# Altium PCB aig21.PcbDoc
Units mil, origin at the board's own origin, x right, y up, seen from the top; angles counter-clockwise.
Board outline 2204.72 x 2204.72 mil, 2 copper layers (Top Layer, Bottom Layer), stack 61.855 mil thick; 150 components, 127 nets, 508 pads, 20 vias.
Unrouted connection lines stored in the file: 40.
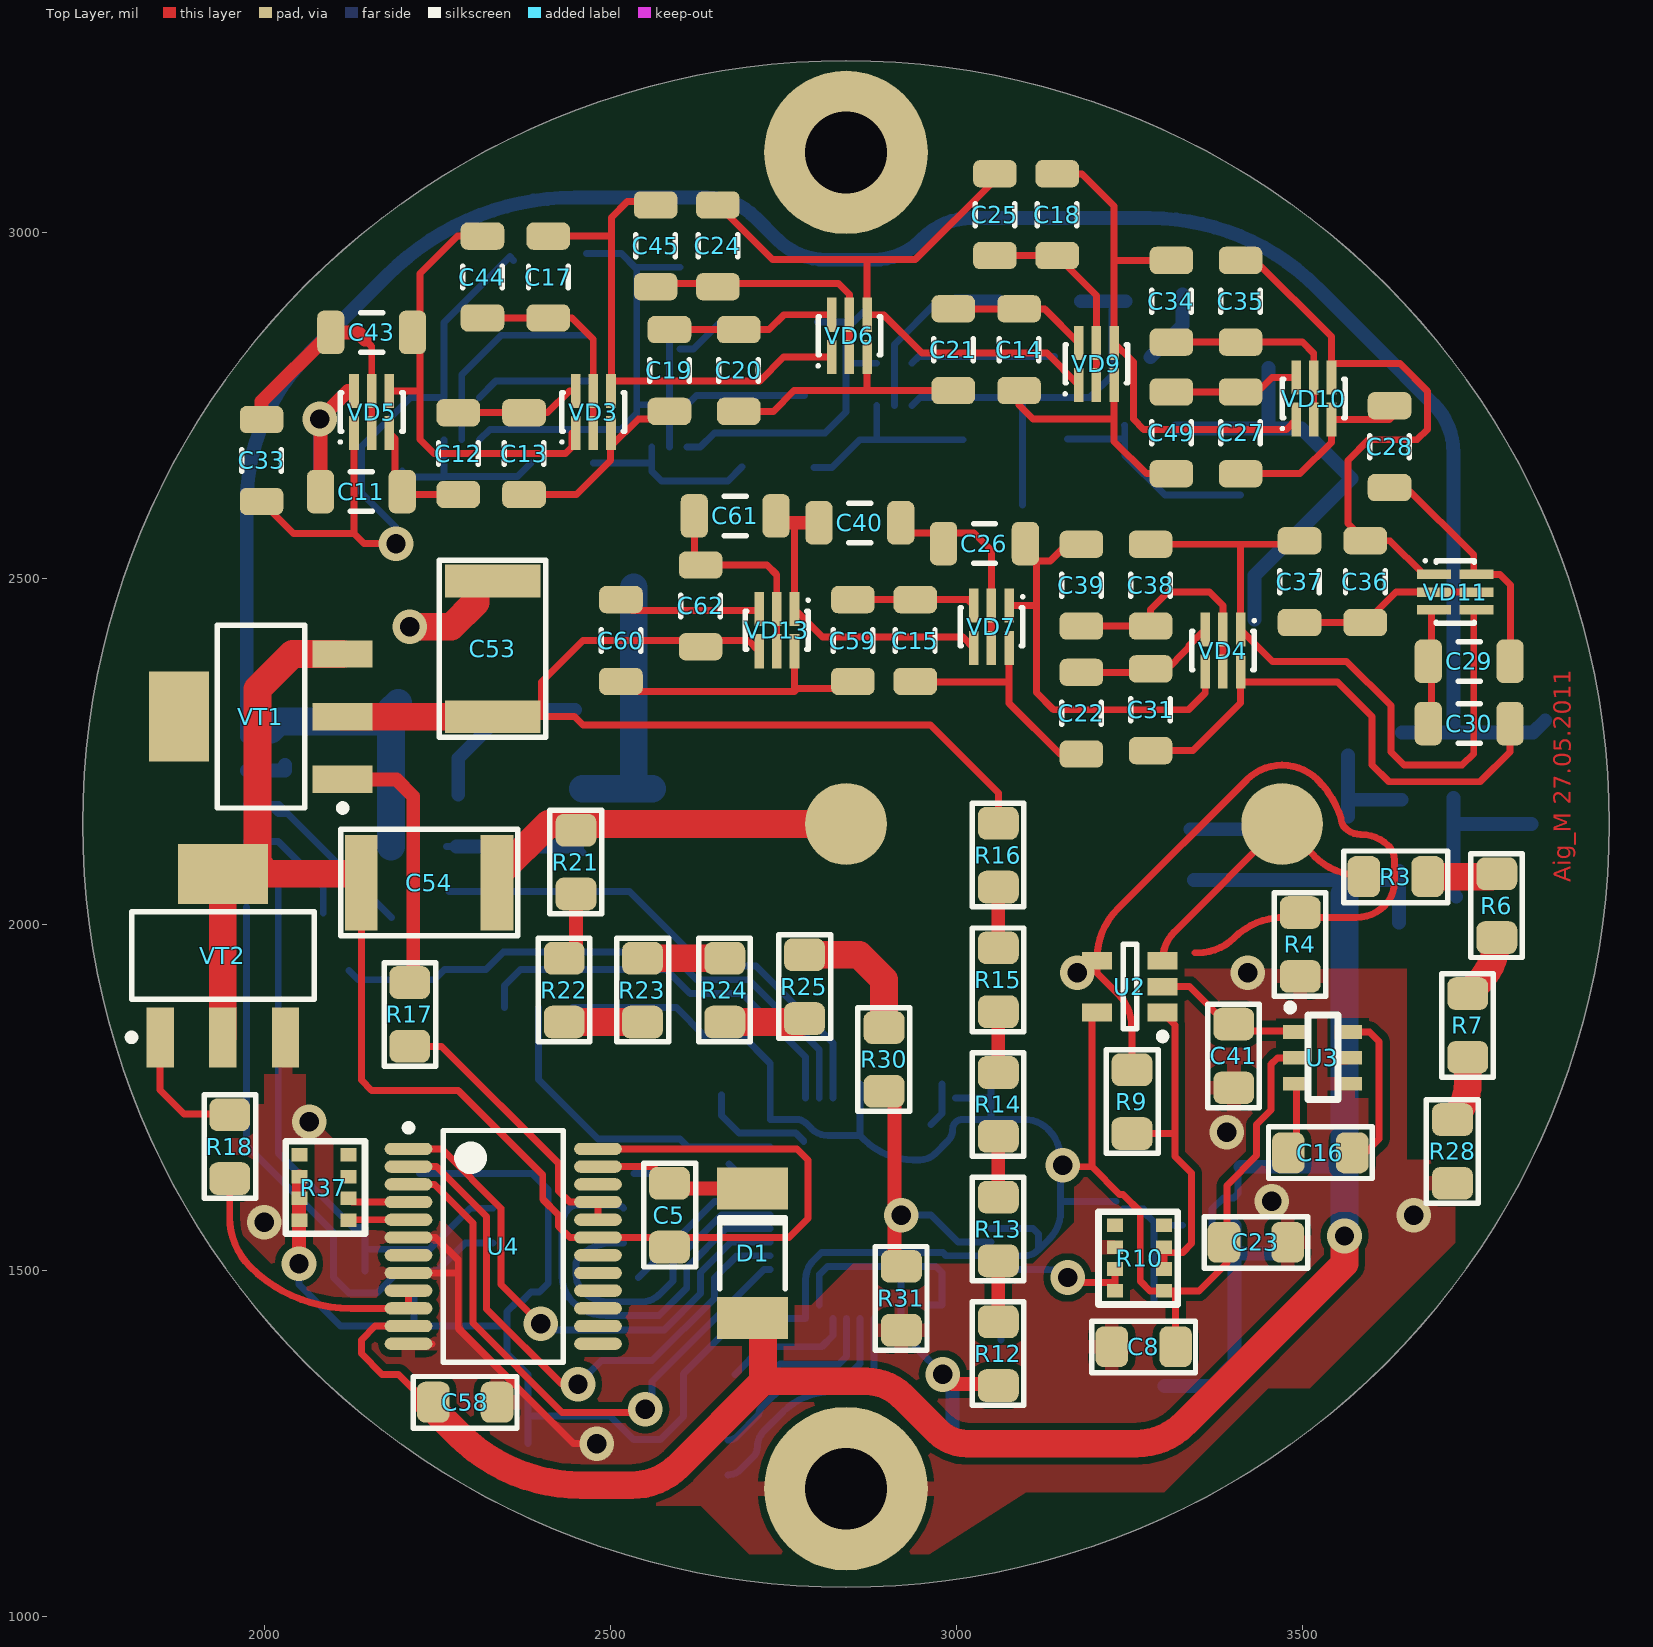
[diagram p0: Top Layer view]
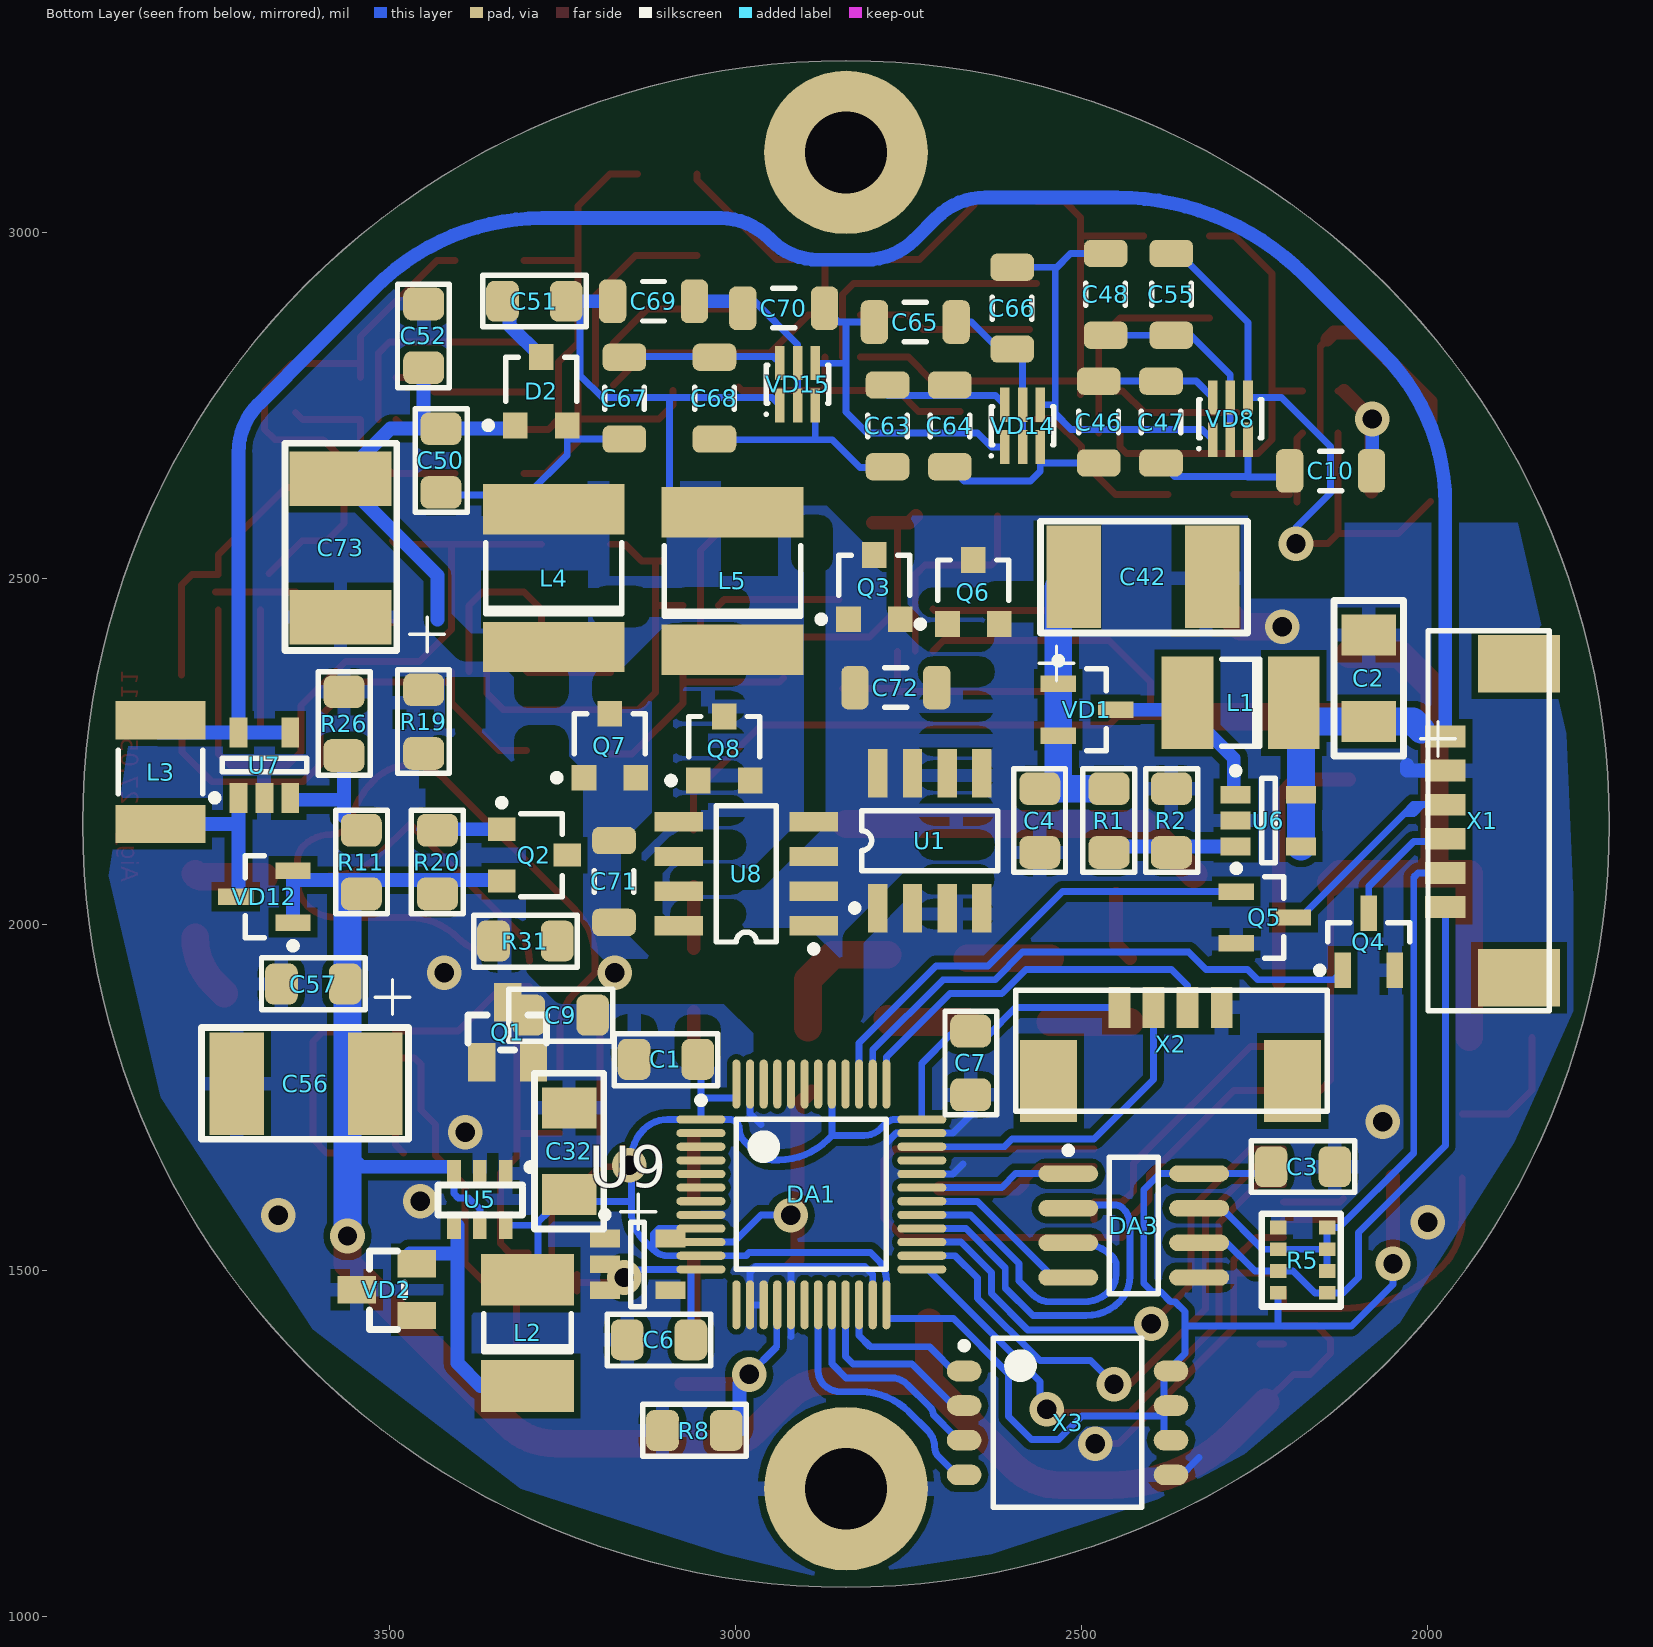
[diagram p1: Bottom Layer view, seen from below]
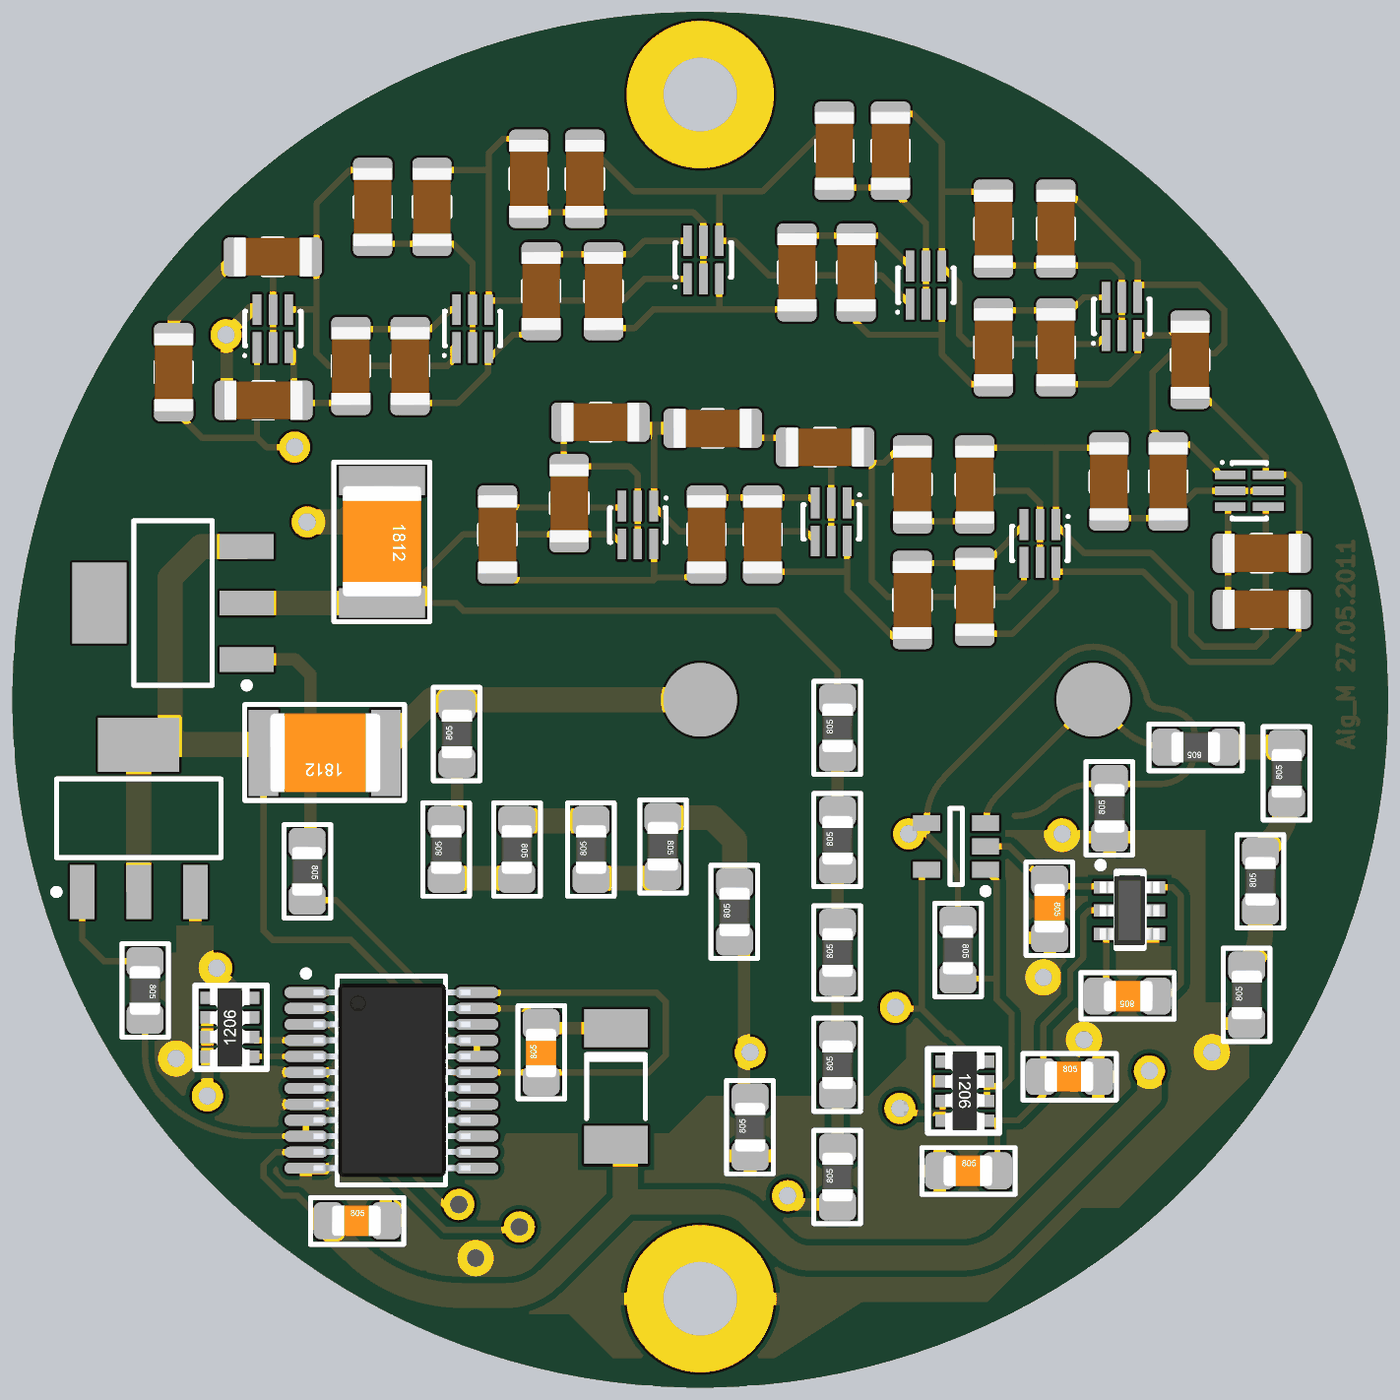
[diagram p2: 3D render of the assembled board from above, using the file's embedded part models]
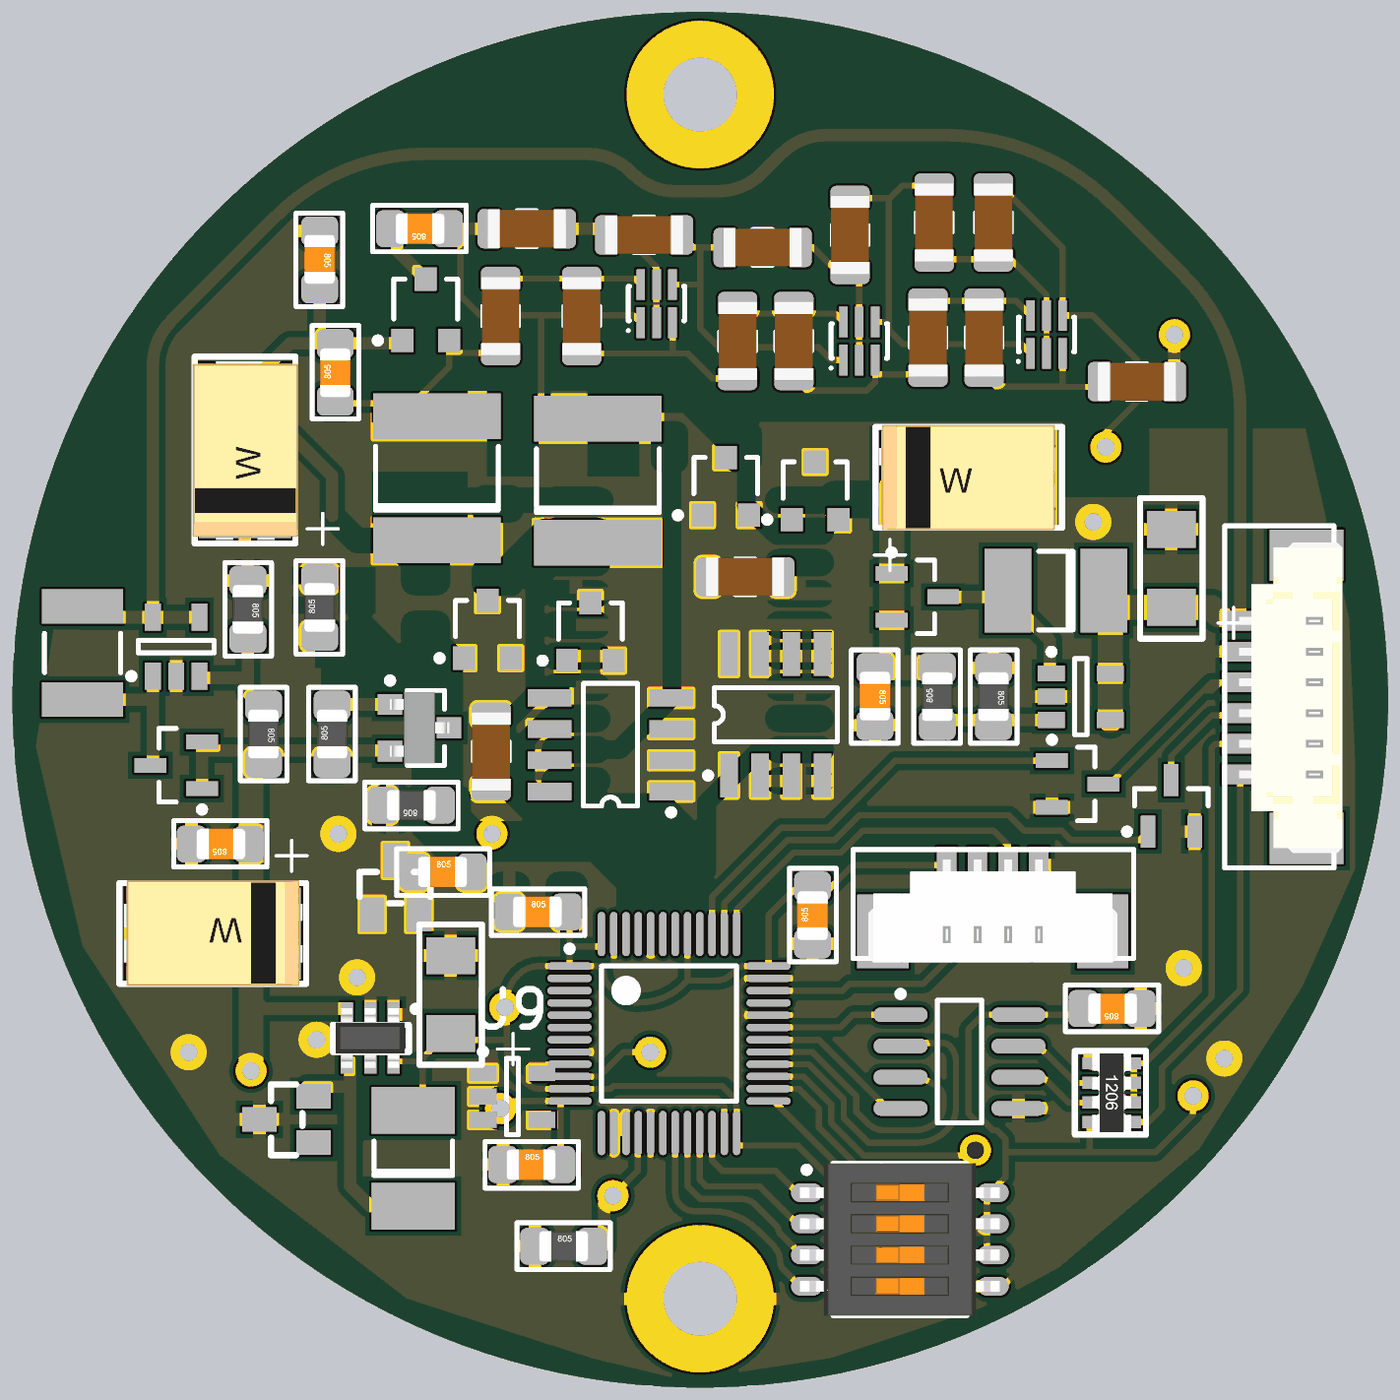
[diagram p3: 3D render of the assembled board from below, using the file's embedded part models]

## Layer stack, top to bottom
Top Layer: signal copper 1.4
Dielectric: core 59.0551, FR-4, Dk 4.8
Bottom Layer: signal copper 1.4

## Board outline
1737.64,2145 ccw(c2840,2145) 2840,1042.64 ccw(c2840,2145) 3942.36,2145 ccw(c2840,2145) 2840,3247.36 ccw(c2840,2145)

## Design rules (kind name [scope] priority, off if disabled: settings)
Clearance CPU [InComponent('DA1')] p1: gap=7.87
Clearance HV2_2 [InNetClass('HV2') vs InNetClass('HV2')] p2: gap=10
Clearance HV2 [All vs InNetClass('HV2')] p3: gap=78.74
Clearance HV1 [InNet('NetC54_1')] p4: gap=78.74
Clearance [All] p5: gap=10
DiffPairsRouting [All] p1: maxlimit=10 minlimit=10 mostfreqgap=10 maxuncoupledlength=500
HoleSize [All] p1 off: absolutevalues=TRUE maxlimit=100 minlimit=1 maxpercent=80.000 minpercent=20.000
MinimumSolderMaskSliver [All] p1 off: minsoldermaskwidth=10
PolygonConnect "for VIA" [All vs IsVia] p1: connectstyle=Direct reliefconductorwidth=10 reliefentries=4 polygonreliefangle="90 Angle"
PolygonConnect [All] p2: connectstyle=Relief reliefconductorwidth=20 reliefentries=4 polygonreliefangle="90 Angle"
RoutingVias [All] p1: holewidth=28 width=50 viastyle="Through Hole" minholewidth=28 minwidth=50 maxholewidth=28 maxwidth=50
SilkToSilkClearance [All] p1 off: silktosilkclearance=10
SilkscreenOverComponentPads [All] p1 off: minsilkscreentomaskgap=10
SolderMaskExpansion [All] p1: expansion=4
Width [All] p1: maxlimit=40 minlimit=10 preferedwidth=20
23 further rules are at their usual default settings.

## Classes and differential pairs
differential pair RS485: +RS485_P -RS485_N

## Components (designator, comment, footprint, x,y, rotation, side; value= is the part's Value field where it differs from the comment)
C1 "C0805" CC0805 3100,1805 r180 bottom
C2 "CAPASITOR A" "CAPASITOR A" 2085,2293 r90 bottom
C3 "C0805" CC0805 2180,1650 r0 bottom
C4 "C0805" CC0805 2560,2150 r270 bottom
C5 "C0805" CC0805 2585,1580 r90 top
C6 "C0805" CC0805 3110,1400 r180 bottom
C7 "C0805" CC0805 2660,1800 r90 bottom
C8 "C0805" CC0805 3270,1390 r0 top
C9 "C0805" CC0805 3252,1869 r180 bottom
C10 "C1206" С1206 2140,2655 r0 bottom
C11 "C1206" С1206 2140,2625 r180 top
C12 "C1206" С1206 2280,2680 r270 top
C13 "C1206" С1206 2375,2680 r90 top
C14 "C1206" С1206 3090,2830 r90 top
C15 "C1206" С1206 2940,2410 r270 top
C16 "C0805" CC0805 3525,1670 r180 top
C17 "C1206" С1206 2410,2935 r270 top
C18 "C1206" С1206 3145,3025 r270 top
C19 "C1206" С1206 2585,2800 r270 top
C20 "C1206" С1206 2685,2800 r90 top
C21 "C1206" С1206 2995,2830 r270 top
C22 "C1206" С1206 3180,2305 r90 top
C23 "C0805" CC0805 3432,1541 r0 top
C24 "C1206" С1206 2655,2980 r270 top
C25 "C1206" С1206 3055,3025 r90 top
C26 "C1206" С1206 3040,2550 r0 top
C27 "C1206" С1206 3410,2710 r90 top
C28 "C1206" С1206 3625,2690 r90 top
C29 "C1206" С1206 3740,2380 r0 top
C30 "C1206" С1206 3740,2290 r180 top
C31 "C1206" С1206 3280,2310 r270 top
C32 "CAPASITOR A" "CAPASITOR A" 3240,1610 r90 bottom
C33 "C1206" С1206 1995.94,2670 r270 top
C34 "C1206" С1206 3310,2900 r90 top
C35 "C1206" С1206 3410,2900 r270 top
C36 "C1206" С1206 3590,2495 r90 top
C37 "C1206" С1206 3495,2495 r270 top
C38 "C1206" С1206 3280,2490 r90 top
C39 "C1206" С1206 3180,2490 r270 top
C40 "C1206" С1206 2860,2580 r0 top
C41 "C0805" CC0805 3400,1810 r270 top
C42 "CAPASITOR C" "CAPASITOR C" 2511,2502 r180 bottom
C43 "C1206" С1206 2155,2855 r180 top
C44 "C1206" С1206 2315,2935 r90 top
C45 "C1206" С1206 2565,2980 r90 top
C46 "C1206" С1206 2475,2725.51 r270 bottom
C47 "C1206" С1206 2385,2725.51 r90 bottom
C48 "C1206" С1206 2465,2910 r90 bottom
C49 "C1206" С1206 3310,2710 r270 top
C50 "C0805" CC0805 3425,2670 r90 bottom
C51 "C0805" CC0805 3290,2900 r0 bottom
C52 "C0805" CC0805 3450,2850 r270 bottom
C53 "CC1812" CC1812 2330,2400 r270 top
C54 "CC1812" CC1812 2240,2060 r180 top
C55 "C1206" С1206 2370,2910 r270 bottom
C56 "CAPASITOR C" "CAPASITOR C" 3520,1770 r0 bottom
C57 "C0805" CC0805 3609.37,1913.82 r0 bottom
C58 "C0805" CC0805 2290,1310 r0 top
C59 "C1206" С1206 2850,2410 r90 top
C60 "C1206" С1206 2515,2410 r270 top
C61 "C1206" С1206 2680,2590 r0 top
C62 "C1206" С1206 2630,2460 r90 top
C63 "C1206" С1206 2780,2720 r270 bottom
C64 "C1206" С1206 2690,2720 r90 bottom
C65 "C1206" С1206 2740,2870 r0 bottom
C66 "C1206" С1206 2600,2890 r270 bottom
C67 "C1206" С1206 3160,2760 r270 bottom
C68 "C1206" С1206 3030,2760 r90 bottom
C69 "C1206" С1206 3118,2900 r0 bottom
C70 "C1206" С1206 2930,2890 r0 bottom
C71 "C1206" С1206 3175,2062 r90 bottom
C72 "C1206" С1206 2768,2342 r0 bottom
C73 "CAPASITOR C" "CAPASITOR C" 3570.05,2443.94 r90 bottom
D1 "ZMU150" MELF 2705,1525 r90 top
D2 "BAV99" SOT-23#1 3280,2770 r180 bottom
DA1 "STM32F100C8" LQFP48_N 2890,1610 r180 bottom
DA3 "MAX3485ESA" NSO8_N 2424.43,1565.07 r180 bottom
L1 "LQH43CN220K" 1812#1 2270,2320 r0 bottom
L2 "LQH43CN220K" 1812#1 3300,1410 r90 bottom
L3 "LQH43CN220K" 1812#2 3830,2220 r270 bottom
L4 "C2220" 2220 3262,2500 r90 bottom
L5 "C2220" 2220 3004,2496 r90 bottom
Q1 "2N7002" SOT-23#2 3366,1801 r180 bottom
Q2 "BSH201" SOT23 3290,2100 r270 bottom
Q3 "IRLML2402" SOT-23#3 2799,2487 r180 bottom
Q4 "2N7002" SOT23_N 2085,1975 r90 bottom
Q5 "2N7002" SOT23_N 2235,2010 r180 bottom
Q6 "IRLML2402" SOT-23#3 2656,2480 r180 bottom
Q7 "IRLML2402" SOT-23#3 3181,2258 r180 bottom
Q8 "IRLML2402" SOT-23#3 3016,2254 r180 bottom
R1 "" RR0805 2460,2150 r270 bottom
R2 "" RR0805 2370,2150 r90 bottom
R3 "" RR0805 3634,2069 r0 top
R4 "" RR0805 3496,1971 r270 top
R5 "CAY16-J4" CAY16-F4 2184.43,1515.07 r90 bottom
R6 "" RR0805 3780,2027 r270 top
R7 "" RR0805 3738,1854 r270 top
R8 "" RR0805 3059,1269 r0 bottom
R9 "" RR0805 3253,1744 r90 top
R10 "CAY16-J4" CAY16-F4 3260,1518 r90 top
R11 "" RR0805 3540,2090 r90 bottom
R12 "" RR0805 3060,1380 r270 top
R13 "" RR0805 3060,1560 r270 top
R14 "" RR0805 3060,1740 r270 top
R15 "" RR0805 3060,1920 r270 top
R16 "" RR0805 3060,2100 r270 top
R17 "" RR0805 2210,1870 r90 top
R18 "" RR0805 1950,1679 r90 top
R19 "" RR0805 3450,2293 r270 bottom
R20 "" RR0805 3430,2090 r270 bottom
R21 "" RR0805 2450,2090 r270 top
R22 "" RR0805 2433,1905 r270 top
R23 "" RR0805 2546,1905 r90 top
R24 "" RR0805 2665,1905 r270 top
R25 "" RR0805 2780,1910 r90 top
R26 "" RR0805 3565,2290 r90 bottom
R28 "" RR0805 3716,1672 r270 top
R30 "" RR0805 2895,1805 r270 top
R31 "" RR0805 3303,1976 r180 bottom
R31 "" RR0805 2920,1460 r270 top
R37 "CAY16-J4" CAY16-F4 2090,1620 r270 top
U1 "L6384" SO8 2719,2121 r180 bottom
U2 "LT6003" SOT23-5_N 3250,1910 r180 top
U3 "ADM8828/29" SOT23-6 3521,1811 r270 top
U4 "ir2214" ssop24 2345,1535 r0 top
U5 "MAX1836EUT33" SOT23-6 3365,1610 r0 bottom
U6 "LM2733XMF" MF05A_N 2230,2150 r180 bottom
U7 "LM2733XMF" MF05A_N 3680,2230 r90 bottom
U8 "L6384" SO8 2984,2073 r90 bottom
U9 "LP2980AIM5-2.5" MF05A_N 3141,1509 r180 bottom
VD1 "BAT54A" SOT23_N 2492,2310 r180 bottom
VD2 "BAT54A" SOT-23#2 3460,1435 r90 bottom
VD3 "BAV99BRW" SOT-363 2475,2740 r0 top
VD4 "BAV99BRW" SOT-363 3384.41,2395.51 r180 top
VD5 "BAV99BRW" SOT-363 2155,2740 r0 top
VD6 "BAV99BRW" SOT-363 2845,2850 r0 top
VD7 "BAV99BRW" SOT-363 3050,2430 r180 top
VD8 "BAV99BRW" SOT-363 2285,2730.51 r180 bottom
VD9 "BAV99BRW" SOT-363 3201.69,2809.49 r0 top
VD10 "BAV99BRW" SOT-363 3515.59,2759.49 r0 top
VD11 "BAV99BRW" SOT-363 3720,2480 r270 top
VD12 "BAT54A" SOT23_N 3680,2040 r0 bottom
VD13 "BAV99BRW" SOT-363 2740,2425 r180 top
VD14 "BAV99BRW" SOT-363 2585,2720 r180 bottom
VD15 "BAV99BRW" SOT-363 2910,2780 r180 bottom
VT1 "STN1NK80Z" SOT223_N 1995,2300 r180 top
VT2 "STN1NK80Z" SOT223_N 1940,1955 r90 top
X1 "53398-0671" 53398-0671 1940,2165 r90 bottom
X2 "53398-0471" 53398-0471 2445,1880 r180 bottom
X3 "DIP4_SMD" DIP4_SOP 2520,1280 r180 bottom

## Footprints (in the part's own frame and the unit in brackets; to place one, negate y for a bottom-side part, rotate by r counter-clockwise, add the part's x,y. Pads: shape width x height; smd on the part's side, far side on the other; paste and mask are expansions set on the pad)
1812#1 [mm] "Chip Capacitor; Body 4.5 x 3.2 mm (LxW typ)"
  rect 1.9x3.4 smd: 1(-1.95,0) 2(1.95,0)
  silkscreen extent -0.7,-1.6 0.7,1.6
1812#2 [mm] "Chip Capacitor, Body 4.5x3.2mm, IPC High Density"
  rect 1.4x3.3 smd: 1(-1.9,0) 2(1.9,0)
  silkscreen extent -0.8,-1.55 0.8,1.55, body extent -2.4,-1.7 2.4,1.7, height 1.4
2220 [mm] "Chip Capacitor; Body 5.7 x 5.0 mm (LxW typ)"
  rect 1.85x5.2 smd: 1(-2.525,0) 2(2.525,0)
  silkscreen extent -1.3,-2.5 1.3,2.5
53398-0471 [mm]
  rect 0.8x1.5 smd: 1(0,0) 2(1.25,0) 3(2.5,0) 4(3.75,0)
  rect 2.1x3 smd: 5(-2.6,-2.7) 6(6.35,-2.7)
  silkscreen extent -3.81,-3.81 7.62,0.64, body extent -3.2,-3.96 6.95,0.24, height 4.7
53398-0671 [mm]
  rect 0.8x1.5 smd: 1(-3.55,0.875) 2(-2.3,0.875) 3(-1.05,0.875) 4(0.2,0.875) 5(1.45,0.875) 6(2.7,0.875)
  rect 2.1x3 smd: 7(-6.15,-1.825) 8(5.375,-1.825)
  silkscreen extent -7.36,-2.94 6.58,1.51, body extent -6.75,-3.27 5.9,0.93, height 4.7
"CAPASITOR A" [mm]
  rect 1.5x2 smd: 1(0,0) 2(3.175,0)
  silkscreen extent -1.27,-3.17 4.44,1.27
"CAPASITOR C" [mm]
  rect 2x3.75 smd: 1(0,0) 2(5.08,0)
  silkscreen extent -1.27,-3.81 6.38,2.04, body extent -1.08,-2.18 6.22,2.12, height 1.5
CAY16-F4 [mm]
  rect 0.5x0.6 smd: 1(-1.2,-1) 2(-1.2,0.8) 3(-0.4,-1) 4(-0.4,0.8) 5(0.4,-1) 6(0.4,0.8) 7(1.2,-1) 8(1.2,0.8)
  silkscreen extent -1.7,-1.5 1.7,1.4, body extent -1.6,-0.9 1.6,0.7, height 0.5
CC0805 [mm]
  rrect50% 1.2x1.5 smd: 1(-1.17,0) 2(1.17,0)
  silkscreen extent -1.9,-0.96 1.9,0.94, body extent -1.03,-0.62 0.97,0.63, height 0.78
CC1812 [mm]
  rect 1.2x3.5 smd: 1(-2.44,0) 2(2.54,0)
  silkscreen extent -3.2,-1.96 3.3,1.94, body extent -2.22,-1.6 2.28,1.6, height 1.6
DIP4_SOP [mm] "SOP, 8-Leads, Body 6.2x6.2mm (max), Pitch 1.27mm, IPC Medium Density"
  oval 1.27x0.76 smd: 1(-3.795,1.905) 2(3.795,1.905) 3(-3.795,0.635) 4(3.795,0.635) 5(-3.795,-0.635) 6(3.795,-0.635) 7(-3.795,-1.905) 8(3.795,-1.905)
  silkscreen extent -3.92,-3.1 2.72,3.1, body extent -4.07,-3.1 4.07,3.11, height 2.35
LQFP48_N [mm] "Thin QFP, 48-Leads, Body 7x7mm, Pitch 0.5mm, IPC Medium Density"
  oval 1.8x0.3 smd: 1(-4.05,2.75) 2(-4.05,2.25) 3(-4.05,1.75) 4(-4.05,1.25) 5(-4.05,0.75) 6(-4.05,0.25) 7(-4.05,-0.25) 8(-4.05,-0.75) 9(-4.05,-1.25) 10(-4.05,-1.75) 11(-4.05,-2.25) 12(-4.05,-2.75) 25(4.05,-2.75) 26(4.05,-2.25) 27(4.05,-1.75) 28(4.05,-1.25) 29(4.05,-0.75) 30(4.05,-0.25) 31(4.05,0.25) 32(4.05,0.75) 33(4.05,1.25) 34(4.05,1.75) 35(4.05,2.25) 36(4.05,2.75)
  oval 0.3x1.8 smd: 13(-2.75,-4.05) 14(-2.25,-4.05) 15(-1.75,-4.05) 16(-1.25,-4.05) 17(-0.75,-4.05) 18(-0.25,-4.05) 19(0.25,-4.05) 20(0.75,-4.05) 21(1.25,-4.05) 22(1.75,-4.05) 23(2.25,-4.05) 24(2.75,-4.05) 37(2.75,4.05) 38(2.25,4.05) 39(1.75,4.05) 40(1.25,4.05) 41(0.75,4.05) 42(0.25,4.05) 43(-0.25,4.05) 44(-0.75,4.05) 45(-1.25,4.05) 46(-1.75,4.05) 47(-2.25,4.05) 48(-2.75,4.05)
  silkscreen extent -4.18,-2.75 2.75,3.57, body extent -3.5,-3.5 3.5,3.5, height 1.6
MELF [mm] "Metal Electrode Face (MELF) Diode; Body 5 x 2.5 mm (LxDia)"
  rect 1.55x2.6 smd: 1(-2.375,0) 2(2.375,0)
  silkscreen extent -1.3,-1.2 1.3,1.2
MF05A_N [mm] "SOT23, 5-Leads, Body 2.9x1.6mm, Pitch 0.95mm, Lead Span 2.8mm, IPC Medium Density"
  rect 1.1x0.65 smd: 1(-1.2,0.95) 2(-1.2,0) 3(-1.2,-0.95) 4(1.2,-0.95) 5(1.2,0.95)
  silkscreen extent -1.33,-1.55 0.25,1.95, body extent -0.9,-1.55 0.9,1.55, height 1.19
NSO8_N [mm] "SOIC, 8-Leads, Body 4.9x3.9mm, Pitch 1.27mm, IPC Medium Density"
  oval 2.2x0.6 smd: 1(-2.4,1.905) 2(-2.4,0.635) 3(-2.4,-0.635) 4(-2.4,-1.905) 5(2.4,-1.905) 6(2.4,-0.635) 7(2.4,0.635) 8(2.4,1.905)
  silkscreen extent -2.53,-2.5 0.9,2.88, body extent -2,-2.5 2,2.5, height 1.75
RR0805 [mm]
  rrect50% 1.2x1.5 smd: 1(-1.17,0) 2(1.17,0)
  silkscreen extent -1.9,-0.96 1.9,0.94, body extent -1,-0.62 1,0.63, height 0.78
SO8 [mil]
  rect 28x70 smd: 1(-75,-97.36) 2(-25,-97.36) 3(25,-97.36) 4(75,-97.36) 5(75,97.36) 6(25,97.36) 7(-25,97.36) 8(-75,97.36)
  silkscreen extent -113,-102 98,43
SOT23 [mm]
  rect 0.85x1 smd: 1(-0.95,-1.2) 2(0.95,-1.2) 3(0,1.2)
  silkscreen extent -2.05,-1.32 1.52,1.02, body extent -1.45,-1.21 1.45,1.21, height 0.99
SOT23-5_N [mm] "SOT23, 5-Leads, Body 2.9x1.6mm, Pitch 0.95mm, Lead Span 2.8mm, IPC Medium Density"
  rect 1.1x0.65 smd: 1(-1.2,0.95) 2(-1.2,0) 3(-1.2,-0.95) 4(1.2,-0.95) 5(1.2,0.95)
  silkscreen extent -1.33,-1.55 0.25,1.95, body extent -0.9,-1.55 0.9,1.55, height 1.45
SOT23-6 [mm]
  rect 0.5x1 smd: 1(-0.853,-0.77) 2(0.097,-0.77) 3(1.047,-0.77) 4(1.047,1.13) 5(0.097,1.13) 6(-0.853,1.13)
  silkscreen extent -1.88,-1.13 1.63,0.75, body extent -1.29,-1.03 1.5,1.4, height 1.09
SOT23_N [mm] "SOT23, 3-Leads, Body 2.9x1.3mm, Pitch 0.95mm, Lead Span 2.3mm, IPC Medium Density"
  rect 1.3x0.6 smd: 1(-1.05,0.95) 2(-1.05,-0.95) 3(1.05,0)
  silkscreen extent -1.17,-1.5 0.7,1.93, body extent -0.7,-1.5 0.7,1.5, height 1.1
SOT223_N [mm] "SOT223, 4-Leads, Body 6.5x3.5mm, Pitch 2.3mm, Lead Span 7mm, IPC Medium Density"
  rect 2.2x1 smd: 1(-3,2.3) 2(-3,0) 3(-3,-2.3)
  rect 2.2x3.3 smd: 4(3,0)
  silkscreen extent -3.13,-3.35 1.6,3.47, body extent -1.85,-3.35 1.85,3.35, height 1.8
SOT-23#1 [mm] "SOT-23; 3 Leads; Body 3.0 x 2.6 mm, inc. leads (LxW max)"
  rect 0.9x0.95 smd: 1(-0.95,-1.25) 2(0.95,-1.25) 3(0,1.25)
  silkscreen extent -2.08,-1.37 1.3,1.25
SOT-23#2 [mm]
  rect 1x1.4 smd: 1(0,0) 2(1.9,0) 3(0.95,2.2)
  silkscreen extent -0.51,0.45 2.37,1.73
SOT-23#3 [mm] "SOT-23; 3 Leads; Body 3.1 x 2.5 mm, inc. leads (LxW max)"
  rect 0.9x0.95 smd: 1(-0.95,-1.175) 2(0.95,-1.175) 3(0,1.175)
  silkscreen extent -2.07,-1.3 1.3,1.18
SOT-363 [mm] "SOT-363/SC-88; 6 Leads; Body 2.2 x 2.2 mm, inc. leads (LxW max)"
  rect 0.35x1.25 smd: 1(-0.65,-0.775) 2(0,-0.775) 3(0.65,-0.775) 4(0.65,0.775) 5(0,0.775) 6(-0.65,0.775)
  silkscreen extent -1.2,-1.15 1.15,0.7
ssop24 [mm]
  oval 1.75x0.45 smd: 1(-3.475,3.575) 2(-3.475,2.925) 3(-3.475,2.275) 4(-3.475,1.625) 5(-3.475,0.975) 6(-3.475,0.325) 7(-3.475,-0.325) 8(-3.475,-0.975) 9(-3.475,-1.625) 10(-3.475,-2.275) 11(-3.475,-2.925) 12(-3.475,-3.575) 13(3.475,-3.575) 14(3.475,-2.925) 15(3.475,-2.275) 16(3.475,-1.625) 17(3.475,-0.975) 18(3.475,-0.325) 19(3.475,0.325) 20(3.475,0.975) 21(3.475,1.625) 22(3.475,2.275) 23(3.475,2.925) 24(3.475,3.575)
  silkscreen extent -3.6,-4.25 2.2,4.47, body extent -3.18,-3.94 3.23,3.95, height 1.15
С1206 [mm] "Chip Capacitor, 2-Leads, Body 3.1x1.6mm, IPC High Density"
  rrect50% 1x1.6 smd: 1(-1.5,0) 2(1.5,0)
  silkscreen extent -0.4,-0.72 0.4,0.72, body extent -1.6,-0.8 1.6,0.8, height 1.6

## Part data
C1 C3 C4 C5 C6 C7 C8 C9 C16 C23 C41 C50 C51 C52 C57 C58 L4 L5: "Ceramic Chip Capacitor - Standard"
C10 C11 C12 C13 C14 C15 C17 C18 C19 C20 C21 C22 C24 C25 C26 C27 C28 C29 C30 C31 C33 C34 C35 C36 C37 C38 C39 C40 C43 C44 C45 C46 C47 C48 C49 C55 C59 C60 C61 C62 C63 C64 C65 C66 C67 C68 C69 C70 C71 C72: library part С1206, "Конденсатор"
D1: "High-Voltage Power Zener Diode"
D2: "Silicon Switching Diode Array for High-Speed Switching"
DA1: library part STM32F101C6T6, "STM32 ARM-based 32-bit MCU with 32 Kbytes Flash, 48-pin LQFP, Industrial Temperature"
DA3: library part MAX485ESA, "Low-Power, Slew-Rate-Limited RS-485/RS-422 Transceiver"
L1 L2 L3: library part CDRH127, "Дроссель"
Q1 Q4 Q5: "N-channel Enhancement Mode Field-effect Transistor"
Q2: "P-channel Enhancement Mode MOSFET"
Q3 Q6 Q7 Q8: "HEXFET Power MOSFET"
R1 R2 R3 R4 R6 R7 R8 R9 R11 R12 R13 R14 R15 R16 R17 R18 R19 R20 R21 R22 R23 R24 R25 R26 R28 R30 R31 R31: library part R_0805, "R_0805"
U2: library part MAX4104EUK-T, "740MHz, Low-Noise, Low-Distortion Op Amp in SOT23-5"
U3 U4: "Микросхема"
U5: library part MAX1836, "Микросхема"
U6 U7: "0.6/1.6 MHz Boost Converters With 40V Internal FET Switch in SOT-23"
U9: "Micropower 50 mA Ultra Low-Dropout Regulator In SOT-23 and micro SMD Packages"
VD1 VD2 VD12: "Schottky Barrier Double Diode"
VD3 VD4 VD5 VD6 VD7 VD8 VD9 VD10 VD11 VD13 VD14 VD15: "Диод"
VT1 VT2: library part BSP130, "N-channel Enhancement Mode Vertical D-MOSFET"
X1: "Разъем"
X3: library part SW_DIP4_SMD, "DIP Переключатель"

## Free pads (board coordinates)
  round 236.22 hole 118.11: 0(2840,1185) 0(2840,3115)
  round 118.11 smd: 0(2840,2145) 0(3469.92,2145)

## Via types
v1: diameter 50, hole 28, Top Layer to Bottom Layer, 20 vias

## Nets (pads, with @x,y where several pads share a name; then routed paths per layer and width w, separated by ;. In a path a pad name is that pad's centre, name@x,y a point inside that pad or via, vN(x,y) a via of type N, cw(c..) or ccw(c..) an arc to the next point about the centre after c; other vN are vias at no path point)
+2.5V: C7.2 C8.2 DA1.1 DA1.9 DA1.24 DA1.36 DA1.48 U9.5
+3.3V: C1.2 C3.2 C23.1 C32.1 DA1.11 DA1.41 DA3.8 L2.2 R5.2 R10.1 R37.3 R37.5 R37.7 U2.5 U3.2 U5.6 U9.1 U9.3 X2.1 X3.2 X3.4 X3.6 | length 4821.4
  Top Layer w10: R37.7 R37.5 R37.3 ; v1(3153,1652) 3155,1650 3195,1650 ; U2.5 3195,1864.84 3195,1650 ; 3316.06,1390 3316.06,1463.63 ; U3.2 3463.18,1807.18 3454,1798 3454,1732 3433,1711 3433,1666 3390,1623 3390,1511 3349.76,1470.76 R10.1 3279.24,1470.76 3265,1485 3265,1585 3240,1610 3235,1610 3195,1650
  Top Layer w20: v1(2050,1510) 2050,1635.12 R37.3
  Bottom Layer w10: v1(2050,1510) 2050,1480 2110,1420 2220,1420 ; R5.2 2215.92,1424.08 2220,1420 ; C3.2@2224.05,1640 2226.06,1640 2386.63,1640 2410,1616.63 2410,1482 2397,1469 2385,1469 2371,1455 2365,1455 2350.59,1440.59 2350.59,1420 ; X3.6@2380.59,1250 2380.59,1290 ; X2.1 2595,1880 2635.91,1839.09 2635.91,1840 2690,1840 2730.55,1799.45 2730.55,1718.27 2769.28,1718.27 cw(c2769.28,1700.28) 2782,1713 2790,1705 ccw(c2814.14,1729.14) 2814.14,1695 2860.47,1695 ; DA1.41 2860.47,1695 ; 2998.27,1749.45 3048.9,1749.45 3049.45,1750 ; 3049.45,1560.79 3110.21,1560.79 3118,1553 3118,1530 ; C1.2@3049.45,1805 3049.45,1750 ; v1@3150,1640 3150,1600 ; v1(3153,1652) 3150,1655 3150,1660.54 ccw(c3088.54,1660.54) 3132,1704 ccw(c3097.55,1669.55) 3097.55,1718.27 3049.45,1718.27 ; C32.1@3230,1600 3150,1600 ; C32.1@3240,1588.94 3270,1588.94 3270,1585 3285,1570 ; L2.2@3285,1456.77 3285,1570 ; U5.6@3326.41,1565.51 3289.49,1565.51 3285,1570 ; 2220,1420 2350.59,1420 ; 2350.59,1420 2350.59,1380 2380.59,1350 2380.59,1290 ; 2380.59,1290 2499,1290 2533,1256 2572,1256 2605,1289 2605,1351 2684.55,1430.55 2781.73,1430.55 2781.73,1487.05 cw(c2821.12,1487.05) 2793.27,1514.9 2804.37,1526 2980,1526 2984.58,1521.42 DA1.11 3097.28,1521.42 ccw(c3097.28,1550.72) 3118,1530 ; 2860.47,1695 2866.18,1689.29 ccw(c2936.89,1760) 2936.89,1660 2946.86,1660 ccw(c2946.86,1691.72) 2969.29,1669.29 2986.93,1686.93 ccw(c2969.86,1704) 2994,1704 cw(c3008.49,1704) 2998.24,1714.24 cw(c3007.96,1704.53) 3007.96,1718.27 3049.45,1718.27 ; 3049.45,1718.27 3049.45,1750 ; 3118,1530 3133.74,1545.74 ccw(c3094.47,1585) 3150,1585 3150,1600
+24V: C56.1 C57.1 C58.1 D1.1 Q2.2 R11.1 R20.2 U1.2 U4.11 U8.2 VD12.1 VD12.2 | length 3024.1
  Top Layer w10: U4.11 2159.84,1419.84 2140,1400 2140,1380 2170,1350 2193.94,1350 C58.1@2233.94,1310
  Top Layer w40: C58.1@2233.94,1310 2280.03,1263.9 ccw(c2458.45,1442.32) 2458.45,1190 2530,1190 ccw(c2530,1286.57) 2598.28,1218.28 2720,1340 ; D1.1@2720,1425 2720,1340 ; v1(3560,1550) 3560,1510 3329.29,1279.29 cw(c3258.58,1350) 3258.58,1250 3015.9,1250 cw(c3015.9,1312.52) 2971.69,1268.31 2921.69,1318.31 ccw(c2869.33,1265.95) 2869.33,1340 2720,1340
  Bottom Layer w10: 3368.82,1565.51 3368.82,1588.82 3385,1605 3400,1605 3406.22,1611.22 3406.22,1640.32
  Bottom Layer w20: Q2.2@3342.68,2063.94 3540,2063.94 3638.66,2063.94 ; 3410,1650 3540,1650 3560,1670 ; VD12.1 3638.66,2063.94 ; VD12.2 3638.66,2063.94
  Bottom Layer w40: v1(3560,1550) 3560,1670 R11.1@3560,2043.94
+38V: C4.1 C42.1 Q3.3 Q7.3 R1.1 VD1.1 VD1.2 | length 376.7
  Bottom Layer w40: R1.1 C4.1 ; C4.1@2533.34,2210 VD1.2 VD1.1 C42.1@2533.34,2486.66
+EGB: C2.1 L1.1 L3.1 U6.4 U6.5 U7.4 U7.5 X1.6 | length 3508.3
  Bottom Layer w20: X1.6 1974.45,2607.48 cw(c2280.99,2607.48) 2064.23,2824.23 2177.89,2937.89 cw(c2448.55,2667.24) 2448.55,3050 2525.97,3050 ; 2525.43,3050 cw(c2525.97,2549.93) 2525.97,3050 ; U7.4 U7.5 ; L3.1@3850,2294.8 3832.44,2277.24 U7.5 ; 2525.97,3050 2638.58,3050 cw(c2638.58,2950) 2709.29,3020.71 2740.71,2989.29 ccw(c2811.42,3060) 2811.42,2960 2880,2960 ccw(c2880,3056.57) 2948.28,2988.28 2950.71,2990.71 cw(c3021.42,2920) 3021.42,3020 3278.59,3020 cw(c3278.59,2678.6) 3520,2920.01 3605.36,2834.63 3688.11,2751.89 cw(c3617.4,2681.18) 3717.4,2681.18 U7.5
  Bottom Layer w40: 2009,2281 2021,2293 C2.1 2180.76,2293 L1.1@2182.76,2291 ; U6.4 U6.5 L1.1@2182.76,2291 ; L1.1 2182.76,2309.53 L1.1@2182.76,2291
-3.3V: C41.1 U2.2 U3.1 | length 219.8
  Top Layer w10: U2.2 3336.06,1910 3400,1846.06 3400.16,1846.22 U3.1@3490.51,1846.22
-24V: C50.2 C52.2 C73.2 D2.1 R19.1 | length 635.7
  Bottom Layer w20: D2.1@3317.4,2716.06 C50.2 C50.2@3441.97,2716.06 ; 3430,2440 3430,2503.89 C73.2 3497.92,2716.06 C50.2@3441.97,2716.06 ; C52.2 3450,2724.09 C50.2@3441.97,2716.06
DE: DA1.29 DA3.3 | length 465.7
  Bottom Layer w10: DA3.3@2516.22,1540 cw(c2518.92,1484.56) DA3.3 2503.44,1540.07 ccw(c2503.44,1471.56) 2455,1520 ccw(c2467.07,1507.93) 2450,1507.93 2450,1494.14 ccw(c2484.14,1494.14) 2460,1470 ccw(c2496.21,1506.21) 2496.21,1455 2545.86,1455 ccw(c2545.86,1489.14) 2570,1465 2590,1485 2590,1510 2660.47,1580.47 DA1.29
EMU: C6.2 DA1.12 R10.2 R10.4 | length 311.6
  Top Layer w10: v1(3160,1490) 3167.24,1482.76 3225.75,1482.76 R10.2@3228.5,1480 ; R10.2 R10.2@3228.5,1480 ; R10.4@3228.5,1494.25 R10.2@3228.5,1480
  Bottom Layer w10: DA1.12 DA1.12@3063.94,1501.73 ; C6.2 DA1.12@3063.94,1501.73 ; v1(3160,1490) ccw(c3131.68,1461.68) 3131.68,1501.73 DA1.12@3063.94,1501.73
FLT_CLR: DA1.25 U4.3 | length 847.9
  Top Layer w10: U4.3 2245.43,1624.57 2301,1569 2301,1424 2430,1295 2545,1295 v1(2550,1300)
  Bottom Layer w10: v1@2560,1295 2560,1340 2721.73,1501.73 DA1.25
GND: C1.1 C2.2 C3.1 C4.2 C6.1 C7.1 C8.1 C9.1 C23.2 C32.2 C41.2 C42.2 C52.1 C53.1 C56.2 C57.2 C58.2 C73.1 DA1.8 DA1.14 DA1.15 DA1.17 DA1.23 DA1.32 DA1.35 DA1.44 DA1.47 DA3.5 pad.0@2840,1185 pad.0@2840,3115 Q1.2 Q4.2 Q5.2 Q6.2 Q8.2 R2.2 R4.2 R5.8 R8.2 R10.6 R26.2 R28.2 R31.2@2920,1413.94 U1.4 U3.4 U3.5 U4.6 U4.8 U4.12 U5.1 U5.2 U6.2 U7.2 U8.4 U9.2 VD2.3 VT2.3 X1.5 X2.4 X3.8 | length 1518.6
  Top Layer w10: U4.12 U4.12@2241.81,1394.25 ; U4.8 2278.39,1496.61 2280,1495 ; U4.6 2247.2,1547.8 2280,1515 2280,1495 ; v1(2480,1250) 2446.72,1250 2280,1416.72 2280,1495
  Top Layer w40: v1(2210,2430) 2270,2430 2305,2465 C53.1@2305,2496.06
  Bottom Layer w10: 2330,1230 2360,1200 X3.8@2380.59,1200 ; C7.1 2660,1724 2685.42,1698.58 DA1.35 2767.42,1698.58 2779,1687 2779,1686.61 ; 2671,1654 2685.47,1639.53 DA1.32 ; DA1.23 2801.42,1494.42 2813,1506 2919,1506 ; 2919.53,1404.53 DA1.17 2919.53,1505.47 2919,1506 ; DA1.15 DA1.14 2978.58,1497.42 2970,1506 2919,1506 ; 2963,1711 2978.58,1726.58 DA1.47
  Bottom Layer w20: X1.5 2030,2222.09 2030,2230
  other v1: 2000,1570 3660,1580 3455,1600 3390,1700 2065,1715 3420,1930
HIN: DA1.27 U4.1 | length 765.4
  Top Layer w10: U4.1 2256.25,1675.75 2342,1590 2342,1480 v1(2399,1423)
  Bottom Layer w10: v1(2399,1423) 2407.76,1414.24 2577.52,1414.24 2630,1466.72 2630,1497 2674.1,1541.1 DA1.27
HV_1000: C53.2 C62.1 R16.1 VD13.4 VT1.2 VT1.4 | length 1463.3
  Top Layer w10: C53.2@2305,2285 C53.2@2320,2300 ; C53.2@2305,2300 C53.2@2320,2300 ; VD13.4 2698.9,2410 2460,2410 2400,2350 2400,2300 ; R16.1@3060,2136.06 R16.1 3060,2190 2962.2,2287.8 2460.2,2287.8 2448,2300 2400,2300 ; C53.2@2320,2300 C53.2 2400,2300
  Top Layer w40: VT1.2 C53.2@2305,2300
HV_SENSE: DA1.16 R8.1 R12.2 | length 286.6
  Top Layer w20: v1(2980,1350) 2993.78,1336.22 R12.2@3077.99,1336.22
  Bottom Layer w10: DA1.16@2940,1430.55 2940,1390 v1(2980,1350)
  Bottom Layer w20: v1(2980,1350) 2993.94,1336.06 R8.1@2993.94,1270
IN_EMU: pad.0@3469.92,2145 R3.1 U2.3 | length 409.7
  Top Layer w10: U2.3 cw(c3357.41,1947.4) 3314.87,1989.94 3469.92,2145 3515.63,2099.29 ccw(c3586.34,2170) R3.1@3586.34,2070
LIN: DA1.26 U4.2 | length 824.5
  Top Layer w10: U4.2 2248.84,1650.16 2321,1578 2321,1444.43 2429.43,1336 v1(2453,1336)
  Bottom Layer w10: v1(2453,1336) 2487,1370 2560,1370 2650,1460 2650,1489 2682.42,1521.42 DA1.26
NetC5_1: C5.1 C54.2 U4.19 U4.24 VT1.3 VT2.2 VT2.4 | length 2318.8
  Top Layer w10: C54.2 2140,1775 2155,1760 2280,1760 2402,1638 2402,1603 2425,1580 2425,1564 2441.2,1547.8 U4.19 2757.8,1547.8 2785,1575 2785,1660 2769.25,1675.75 U4.24
  Top Layer w40: VT2.2 VT2.4 2005,2073.11 ; VT1.3 2040.55,2390.55 1990,2340 1990,2088.11 2005,2073.11 ; C54.2 2126.89,2073.11 2005,2073.11
NetC5_2: C5.2 D1.2 U4.23 | length 236.3
  Top Layer w10: U4.23 2560.91,1650.16 C5.2
  Top Layer w20: C5.2 2592.56,1618.5 D1.2
NetC9_2: C9.2 R25.2 R30.1 R31.2@3256.94,1976 | length 198.9
  Top Layer w40: R25.2 2858.94,1956.06 2895,1920 R30.1
  other v1: 3174,1930
NetC10_1: C10.1 C11.2 VD5.6 | length 246.8
  Top Layer w10: 2120.51,2770.51 VD5.6
  Top Layer w20: C11.2 2080.94,2727.72 ccw(c2077.72,2727.72) v1(2080,2730) 2120.51,2770.51
  Bottom Layer w20: v1(2080,2730) 2080,2655.94 C10.1
NetC10_2: C10.2 C47.1 VD8.3 | length 251.9
  Bottom Layer w10: C10.2 2207.6,2646.46 2260,2646.46 2259.41,2647.05 ; VD8.3 2259.41,2647.05 ; C47.1 2365.59,2647.05 2259.41,2647.05
NetC11_1: C11.1 C12.2 VD5.3 | length 183.3
  Top Layer w10: VD5.3 2188.46,2701.61 C11.1@2188.46,2610 ; C11.1@2199.41,2620.94 C12.2
NetC12_1: C12.1 C13.2 VD3.6 | length 187.4
  Top Layer w10: C12.1@2275,2739.06 C12.1 C13.2 2409.06,2739.06 2440.51,2770.51 VD3.6
NetC13_1: C13.1 C19.2 VD3.3 | length 246.9
  Top Layer w10: C13.1 2450.94,2620.94 2500,2670 2500,2690 2540,2730 C19.2@2565,2730
NetC14_1: C14.1 C49.2 VD9.3 | length 344.9
  Top Layer w10: C14.1 3090,2750 3110,2730 3227.28,2730 ; VD9.3 3227.28,2730 ; C49.2@3305,2650.94 3274.06,2650.94 3227.28,2697.72 3227.28,2730
NetC14_2: C14.2 C21.1 VD9.6 | length 201.4
  Top Layer w10: C21.1 C14.2 3127.05,2889.06 VD9.6
NetC15_1: C15.1 C59.2 VD7.3 | length 177.9
  Top Layer w10: C59.2 C15.1 3015.87,2469.06 VD7.3
NetC15_2: C15.2 C22.1 VD7.6 | length 363
  Top Layer w10: C15.2@2930,2355.94 2935.94,2350 3075.59,2350 ; VD7.6 3075.59,2350 ; C22.1 3149.06,2245.94 3075.59,2319.41 3075.59,2350
NetC16_1: C16.1 U3.6 | length 238.4
  Top Layer w10: U3.6 3596.41,1844.59 3610,1831 3610,1690 3590,1670 C16.1
NetC16_2: C16.2 U3.3 | length 104.6
  Top Layer w10: C16.2 3490.68,1681.75 U3.3
NetC17_1: C17.1 C45.2 VD3.4 VD6.1 | length 753.2
  Top Layer w10: C17.1 2501.18,2994.06 ; VD3.4@2501.18,2765 VD3.4@2501.18,2785 ; C45.2@2565,3044.06 2524.06,3044.06 2501.18,3021.18 2501.18,2994.06 ; VD6.1 2750,2819.49 2715.51,2785 VD3.4@2501.18,2785 ; VD3.4@2501.18,2785 2501.18,2994.06
NetC17_2: C17.2 C44.1 VD3.2 VD3.5 | length 308.3
  Top Layer w10: C44.1 C17.2 2444.06,2875.94 2475,2845 VD3.5 VD3.2
NetC18_1: C18.1 C34.2 VD9.4 VD10.1 | length 751.1
  Top Layer w10: C18.1@3140.94,3084.06 C18.1 3180.94,3084.06 3227.28,3037.72 3227.28,2955 ; C34.2@3305,2959.06 3231.34,2959.06 3227.28,2955 ; VD10.1 3476.02,2715 3270,2715 3255,2730 3255,2812.28 VD9.4 3227.28,2955
NetC18_2: C18.2 C25.1 VD9.2 VD9.5 | length 299.9
  Top Layer w10: C25.1 3144.06,2965.94 3201.69,2908.31 VD9.5 VD9.2
NetC19_1: C19.1 C20.2 VD6.6 | length 254
  Top Layer w10: C19.1@2575,2859.06 C19.1 C20.2 2729.06,2859.06 2750.51,2880.51 VD6.6 VD6.6@2818.9,2880
NetC20_1: C20.1 C21.2 VD6.3 | length 383.3
  Top Layer w10: C20.1@2675,2740.94 C20.1 2735,2740.94 2765,2770.94 2870,2770.94 ; VD6.3 2870.59,2771.54 2870,2770.94 ; C21.2@2995,2775.94 2990,2770.94 2870,2770.94
NetC22_2: C22.2 C31.1 VD4.3 | length 205.8
  Top Layer w10: C22.2 3299.06,2364.06 3335,2400 3335,2402.2 VD4.3
NetC24_1: C24.1 C25.2 VD6.4 VD9.1 | length 911.8
  Top Layer w10: C24.1@2655.94,3039.06 C24.1 2734.06,2960 2940,2960 3055,3075 C25.2 ; 2870.59,2954.41 VD6.4 2894.49,2880.51 2950,2825 3130.08,2825 VD9.1
NetC24_2: C24.2 C45.1 VD6.2 VD6.5 | length 377.1
  Top Layer w10: C45.1@2565,2925.94 2829.06,2925.94 2845,2910 VD6.5 VD6.2
NetC26_1: C26.1 C40.2 VD7.2 VD7.5 | length 286.8
  Top Layer w10: C40.2@2914.06,2565 3025,2565 3050,2540 VD7.2 VD7.5
NetC26_2: C26.2 C39.1 VD4.4 VD7.1 | length 611.3
  Top Layer w10: VD7.1 3114.49,2460.51 3115,2460 ; C26.2@3104.06,2525.94 ccw(c3105,2525.94) 3105,2525 C26.2@3115,2525 ; C39.1 3159.06,2549.06 3135,2525 C26.2@3115,2525 ; VD4.4 3358.82,2333.82 3335,2310 3140,2310 3115,2335 3115,2460 ; 3115,2460 C26.2@3115,2525
NetC27_1: C27.1 C28.2 VD10.3 | length 285.7
  Top Layer w10: C27.1@3405,2650.94 C27.1 3495.94,2650.94 3541.18,2696.18 VD10.3 3624.92,2728.98 C28.2@3635,2739.06
NetC27_2: C27.2 C49.1 VD10.6 | length 193.7
  Top Layer w10: C49.1@3305,2769.06 C49.1 C27.2 3434.06,2769.06 3455,2790 VD10.6
NetC28_1: C28.1 C29.2 VD11.6 | length 379.6
  Top Layer w10: C28.1 3649.06,2630.94 3746.69,2533.31 3746.69,2505.59 VD11.6 3784.41,2505.59 3800,2490 C29.2@3800,2360
NetC29_1: C29.1 C30.2 VD11.3 | length 174.4
  Top Layer w10: C30.2@3685.67,2280 VD11.3@3685.67,2454.41
NetC30_1: C30.1 C31.2 VD4.6 | length 730.6
  Top Layer w10: C31.2@3301.53,2250.94 3340.94,2250.94 3410,2320 VD4.6@3410,2350 ; VD4.6 VD4.6@3410,2350 ; C30.1 3799.06,2249.06 3756,2206 3624,2206 3600,2230 3600,2300 3550,2350 VD4.6@3410,2350
NetC33_1: C33.1 C43.2 VD5.2 VD5.5 | length 360.2
  Top Layer w10: 2145,2845 2155,2835 VD5.5 VD5.2
  Top Layer w20: C33.1 1995.94,2755 C43.2 2135,2855 2145,2845
NetC33_2: C33.2 C55.1 VD5.1 VD8.4 | length 924.3
  Top Layer w10: C33.2 2042.24,2564.65 2129.41,2564.65 ; VD5.1 2129.41,2564.65 ; v1(2190,2550) 2144.06,2550 2129.41,2564.65
  Bottom Layer w10: v1(2190,2550) 2190,2573 2140,2623 2140,2690 2211.02,2761.02 VD8.4 2259.41,2869.41 2354.53,2964.53 C55.1@2360,2959.06
NetC34_1: C34.1 C35.2 VD10.2 VD10.5 | length 312.9
  Top Layer w10: C34.1@3305,2840.94 C34.1 C35.2 3499.06,2840.94 3515.59,2824.41 VD10.5 VD10.2
NetC35_1: C35.1 C36.2 VD10.4 VD11.1 | length 813.7
  Top Layer w10: C35.1@3405,2959.06 C35.1 3430.94,2959.06 3541.18,2848.82 VD10.4@3541.18,2810 ; VD10.4 VD10.4@3541.18,2810 ; VD11.1@3673.17,2506.83 3625.94,2554.06 C36.2 3565,2579.06 3565,2670 3595,2700 3665,2700 3680,2715 3680,2770 3640,2810 VD10.4@3541.18,2810
NetC36_1: C36.1 C37.2 VD11.2 VD11.5 | length 273.8
  Top Layer w10: C37.2 C36.1 3634.06,2480 VD11.2 VD11.5
NetC37_1: C37.1 C38.2 VD4.1 VD11.4 | length 1011.9
  Top Layer w10: C38.2 3410,2549.06 ; C37.1 3490,2549.06 3410,2549.06 ; VD11.4@3746.69,2454.41 3746.69,2246.69 3730,2230 3646,2230 3627,2249 3627,2316 3563,2380 3456.02,2380 VD4.1 3410,2549.06
NetC38_1: C38.1 C39.2 VD4.2 VD4.5 | length 342.5
  Top Layer w10: C39.2 C38.1 3280,2455 3305,2480 3365,2480 3384.41,2460.59 VD4.2 VD4.5
NetC40_1: C40.1 C61.2 VD7.4 VD13.1 | length 474.9
  Top Layer w10: 2760,2580 2765.59,2574.41 VD13.1 2806.1,2415 3008.9,2415 VD7.4
  Top Layer w20: C61.2 2749.06,2580 2760,2580 C40.1
NetC43_1: C43.1 C44.2 VD3.1 VD5.4 | length 648.7
  Top Layer w10: VD5.4 2224.49,2770.51 2224.49,2700.51 2245,2680 2435,2680 2444.41,2689.41 VD3.1@2444.41,2709.49 ; 2225,2770 2225,2940 2279.06,2994.06 C44.2
NetC46_1: C46.1 C47.2 VD8.6 | length 174.2
  Bottom Layer w10: VD8.6 2334.13,2784.57 C47.2 C46.1
NetC46_2: C46.2 C64.1 VD14.3 | length 263.7
  Bottom Layer w10: C46.2 VD14.3@2559,2666.46 ; VD14.3 2559.41,2654.59 2573.41,2640.59 2669.65,2640.59 C64.1
NetC48_1: C48.1 C55.2 VD8.2 VD8.5 | length 297.2
  Bottom Layer w10: VD8.2 VD8.5 2285,2793.37 2342.57,2850.94 C55.2 C48.1
NetC48_2: C48.2 C66.1 VD8.1 VD14.4 | length 618.7
  Bottom Layer w10: VD8.1 2325.59,2715 2515,2715 2537.76,2737.76 2537.76,2750.51 ; C48.2 2515.51,2969.06 2537.76,2946.81 ; VD14.4 2537.76,2750.51 ; C66.1 2540,2949.06 2537.76,2946.81 ; 2537.76,2750.51 2537.76,2946.81
NetC50_1: C50.1 C67.2 D2.2 L4.2 | length 317.6
  Bottom Layer w10: C67.2 3241.1,2700.94 3242.6,2699.45 ; D2.2@3242.44,2720.94 D2.2 3242.6,2699.45 ; C50.1@3410,2620 3300.71,2620 3242.6,2678.11 3242.6,2699.45
NetC51_1: C51.1 C69.2 L5.2 VD15.1 | length 630.4
  Bottom Layer w10: VD15.1 2947.1,2761 3095,2761 ; L5.2@3095,2605.71 3095,2761 ; C51.1@3230,2894.3 3224,2888.3 3224,2793 3192,2761 3095,2761
  Bottom Layer w20: C69.2@3179.06,2900 C51.1
NetC51_2: C51.2 D2.3 | length 109.9
  Bottom Layer w20: D2.3 3326.06,2865.28 C51.2@3326.06,2910
NetC54_1: C54.1 pad.0@2840,2145 R21.1 | length 532.5
  Top Layer w40: C54.1@2337.6,2072.4 2410.19,2145 pad.0@2840,2145
NetC59_1: C59.1 C60.2 VD13.6 | length 395.7
  Top Layer w10: C60.2 2529.41,2336.54 2765.59,2336.54 ; VD13.6 2765.59,2336.54 ; C59.1@2845,2340.94 2770,2340.94 2765.59,2336.54
NetC60_1: C60.1 VD13.3 | length 207
  Top Layer w10: C60.1 2530.94,2453.11 2712.01,2453.11 VD13.3
NetC61_1: C61.1 C62.2 VD13.2 VD13.5 | length 301
  Top Layer w10: C61.1 2620.94,2528.11 C62.2 2725.94,2519.06 2740,2505 VD13.2 VD13.5
NetC63_1: C63.1 C64.2 VD14.6 | length 175
  Bottom Layer w10: VD14.6 2624.13,2764.06 C63.1@2780,2764.06
NetC63_2: C63.2 C68.1 VD15.3 | length 276.6
  Bottom Layer w10: C63.2@2794.06,2660 2820,2660 2860,2700 C68.1@3009.06,2700 ; 2884.41,2704.41 VD15.3
NetC65_1: C65.1 C66.2 VD14.2 VD14.5 | length 248.6
  Bottom Layer w10: VD14.2 VD14.5 C66.2@2585,2840.94 ; C66.2 2619.94,2830.94 2659,2870 C65.1
NetC65_2: C65.2 C70.1 VD14.1 VD15.4 | length 506.4
  Bottom Layer w10: VD14.1 2629.49,2689.49 2650,2710 2810,2710 2840,2740 2840,2810 ; C65.2 2843,2870 ; C70.1 2850.94,2870 2843,2870 ; VD15.4 2840.51,2810.51 2840,2810 ; 2840,2810 2840,2867 2843,2870
NetC67_1: C67.1 C68.2 VD15.6 | length 209.3
  Bottom Layer w10: VD15.6 2945.08,2820 C67.1@3140.94,2820
NetC69_1: C69.1 C70.2 VD15.2 VD15.5 | length 264.9
  Bottom Layer w10: VD15.2 VD15.5 2910,2837.63 2972.37,2900 C70.2@2999.06,2900
  Bottom Layer w20: C70.2@2999.06,2900 C69.1 C69.1@3060.94,2900
NetC71_1: C71.1 U8.8
NetC71_2: C71.2 L4.1 Q7.2 Q8.3 U8.6
NetC72_1: C72.1 L5.1 Q3.2 Q6.3 U1.6
NetC72_2: C72.2 U1.8
NetL1_2: L1.2 U6.1 VD1.3 | length 250.3
  Bottom Layer w20: U6.1@2280,2187.4 2280,2240 2350,2310 VD1.3@2448.66,2310
NetL2_1: L2.1 U5.4 VD2.2 | length 378
  Bottom Layer w20: L2.1 3368.23,1333.23 3401.22,1366.22 U5.4@3401.22,1565.51 ; 3406.22,1524.8 VD2.2@3470,1524.8
NetL3_2: L3.2 U7.1 VD12.3 | length 259.1
  Bottom Layer w20: U7.1 3717.4,2140 ; VD12.3 3717.4,2043.94 3717.4,2140 ; L3.2 3722.6,2145.2 3717.4,2140
NetQ1_3: Q1.3 Q2.1 R20.1 | length 112.8
  Bottom Layer w20: Q2.1 R20.1@3450,2137.4
NetQ2_3: Q2.3 R19.2 R31.1@3349.06,1976
NetQ3_1: Q3.1 U1.7
NetQ4_3: Q4.3 X1.3 | length 176.1
  Bottom Layer w10: X1.3@1974.45,2120 2020,2120 2085,2055 Q4.3
NetQ5_3: Q5.3 X1.4 | length 308.5
  Bottom Layer w10: X1.4 2007.13,2172.87 ; Q5.3@2183.66,2010 2033.66,2160 ; 2007.13,2172.87 2020.79,2172.87 2033.66,2160 ; 2007.13,2172.87 2020,2160 2033.66,2160
NetQ6_1: Q6.1 U1.5
NetQ7_1: Q7.1 U8.7
NetQ8_1: Q8.1 U8.5
NetR1_2: R1.2 R2.1 U6.3 | length 200.4
  Bottom Layer w10: U6.3@2263.23,2112.6 U6.3 ; R1.2@2451.34,2112.6 R1.2
  Bottom Layer w20: U6.3 R1.2@2451.34,2112.6
NetR3_2: R3.2 R6.1 | length 101
  Top Layer w40: R3.2 3770.19,2069 ccw(c3770.19,2082.87) R6.1
NetR4_1: R4.1 R9.2 U2.4 | length 1182.2
  Top Layer w10: 3240,1892.41 3232,1900.41 ; R9.2 3253,1849.72 ccw(c3181.3,1849.72) 3232,1900.41 ; 3344,1959 3348.3,1959 ccw(c3348.3,2033.12) 3400.71,1980.71 cw(c3471.42,1910) 3460.18,2009.37 cw(c3471.42,1910) 3471.42,2010 3576.96,2010 ccw(c3576.96,2068.04) 3618,2027 ccw(c3584.2,2060.8) 3632,2060.8 3632,2093.38 ccw(c3603.94,2093.38) 3623.78,2113.22 ccw(c3583.27,2072.7) 3583.27,2130 cw(c3583.27,2162.03) 3560.62,2139.38 cw(c3573.95,2152.72) 3555.09,2152.72 ccw(c3424.5,2112.07) 3521.21,2208.79 ccw(c3470,2157.57) 3470,2230 ccw(c3470,2157.57) 3418.79,2208.79 3232.05,2022.05 ccw(c3302.76,1951.33) 3202.76,1951.33 U2.4 3202.76,1929.66 3232,1900.41
NetR6_2: R6.2 R7.1 | length 94.2
  Top Layer w40: R7.1 3752.51,1914.57 ccw(c3686.15,1980.94) R6.2
NetR7_2: R7.2 R28.1 | length 95.8
  Top Layer w40: R28.1 ccw(c3662.89,1771.18) 3738,1771.18 R7.2
NetR9_1: R9.1 R10.3 R10.5 U2.1 | length 482
  Top Layer w10: R9.1 3310.32,1697.94 cw(c3310.32,1691.32) 3315,1696 ; U2.1 3315,1854.84 3315,1696 ; R10.3 3299.37,1525.75 3325.75,1525.75 3339,1539 3339,1641 3315,1665 3315,1696
NetR11_2: R11.2 R26.1 U7.3 | length 160.5
  Bottom Layer w20: R11.2@3565,2156.06 R26.1 ; 3570,2180 U7.3@3642.6,2180
NetR12_1: R12.1 R13.2 | length 87.9
  Top Layer w20: R12.1 R13.2
NetR13_1: R13.1 R14.2 | length 87.9
  Top Layer w20: R13.1 R14.2
NetR14_1: R14.1 R15.2 | length 87.9
  Top Layer w20: R14.1 R15.2
NetR15_1: R15.1 R16.2 | length 87.9
  Top Layer w20: R15.1 R16.2
NetR17_1: R17.1 U4.20 U4.21 | length 409
  Top Layer w10: R17.1@2215,1823.94 2256.06,1823.94 2425,1655 2425,1615 2441.02,1598.98 U4.21 U4.20
NetR17_2: R17.2 VT1.1 | length 381
  Top Layer w20: VT1.1 2190.55,2209.45 2215,2185 R17.2@2215,1916.06
NetR18_1: R18.1 U4.9 U4.10 | length 406.7
  Top Layer w10: R18.1@1950,1633.94 R18.1 1950,1576.42 ccw(c2050,1576.42) 1979.29,1505.71 ccw(c2124.81,1651.23) 2124.81,1445.43 U4.10 U4.9
NetR18_2: R18.2 VT2.1 | length 191.2
  Top Layer w10: VT2.1 1849.45,1760.55 1883.94,1726.06 R18.2@1950,1726.06
NetR21_2: R21.2 R22.1 | length 101.2
  Top Layer w20: R22.1@2430,1951.06 2450,1971.06 R21.2
NetR22_2: R22.2 R23.1 | length 115
  Top Layer w40: R22.2@2430,1858.94 R22.2 R23.1@2545,1858.94
NetR23_2: R23.2 R24.1 | length 120
  Top Layer w40: R23.2@2545,1951.06 R23.2 R24.1
NetR24_2: R24.2 R25.1 | length 117.1
  Top Layer w40: R24.2 2775,1858.94 R25.1
NetR37_6: R37.6 U4.4 | length 88.9
  Top Layer w10: R37.6 2126.77,1598.98 U4.4
NetR37_8: R37.8 U4.5 | length 87
  Top Layer w10: R37.8 2122.13,1573.39 U4.5
NetU5_3: U5.3 U5.5
P_F: DA1.38 Q4.1 | length 829
  Bottom Layer w10: Q4.1 2136.06,1920 2245,1920 2260,1935 2320,1935 2345,1960 2585,1960 2625,1920 2700,1920 2801.42,1818.58 DA1.38 DA1.38@2801.42,1749.45
P_I: DA1.39 Q5.1 | length 724.7
  Bottom Layer w10: Q5.1@2266.34,2047.4 Q5.1 2527.6,2047.4 2635,1940 2710,1940 2821.1,1828.9 DA1.39 DA1.39@2821.1,1749.45
PUMP+: DA1.45 U8.1
PUMP-: DA1.42 U1.1
R\E\: DA1.28 DA3.2 | length 583.2
  Bottom Layer w10: DA3.2 ccw(c2507,1578.15) 2507,1595 2452.07,1595 ccw(c2452.07,1577.93) 2440,1590 ccw(c2464.14,1565.86) 2430,1565.86 2430,1491.21 ccw(c2481.21,1491.21) 2445,1455 ccw(c2493.28,1503.28) 2493.28,1435 2570,1435 2610,1475 2610,1504 2666.79,1560.79 DA1.28
R\E\S\E\T\: DA1.7
RS485_N: DA3.7 R5.3 R5.5 R5.6 R5.7 X1.2 | length 886
  Bottom Layer w10: X1.2 2013.66,2074.45 2020,2068.11 2020,1670 2127.69,1562.31 R5.7 ; R5.3 R5.5 ; R5.7@2145.06,1559.94 R5.5 ; DA3.7 2297.72,1590.07 2238.47,1530.81 R5.6 R5.5
RS485_P: DA3.6 R5.1 R5.4 X1.1 | length 856.3
  Bottom Layer w10: X1.1 1974.45,1680.55 2100,1555 2100,1490 2122.18,1467.82 R5.1 2162.82,1467.82 2194.32,1499.32 R5.4 2249.32,1499.32 2290.07,1540.07 DA3.6
RX: DA1.31 DA3.1 | length 204.8
  Bottom Layer w10: DA3.1@2534,1640 2595,1640 2615,1620 DA1.31@2730.55,1620
SHIFT_PWM: DA1.46 Q1.1
SHIFT_SENSE: DA1.10 R30.2 R31.1@2920,1506.06 | length 420.9
  Top Layer w20: R30.2@2890,1758.94 2910,1738.94 2910,1516.06 R31.1@2920,1506.06
  Bottom Layer w10: v1@2910,1580 v1(2920,1580) 2963,1580 3001.9,1541.1 DA1.10
SW1: DA1.22 X3.1 | length 189.4
  Bottom Layer w10: X3.1@2679.41,1350 2719.41,1390 2805,1390 2821.1,1406.1 DA1.22@2821.1,1430.55
SW2: DA1.21 X3.3 | length 247.5
  Bottom Layer w10: X3.3@2679.41,1300 2744.41,1365 2830,1365 2840.79,1375.79 DA1.21@2840.79,1430.55
SW3: DA1.20 X3.5 | length 302.6
  Bottom Layer w10: X3.5 ccw(c2669.41,1273.33) 2682.36,1260.36 2714,1292 cw(c2728.49,1292) 2718.24,1302.24 2751.52,1335.52 cw(c2774.41,1312.63) 2774.41,1345 2840,1345 2860.47,1365.47 DA1.20@2860.47,1430.55
SW4: DA1.19 X3.7 | length 378
  Bottom Layer w10: DA1.19@2880.16,1430.55 2880.16,1354.69 cw(c2852.31,1354.69) 2872,1335 cw(c2847.86,1359.14) 2847.86,1325 2819.42,1325 ccw(c2819.42,1225) 2748.71,1295.71 2721.9,1268.9 ccw(c2745.8,1245) 2712,1245 cw(c2692.69,1245) 2706.34,1231.34 X3.7@2687.49,1212.49 ; X3.7@2687.49,1212.49 cw(c2669.41,1230.57) X3.7 ccw(c2669.41,1230.57) X3.7@2687.49,1212.49
TCK: DA1.37 X2.3 | length 587.7
  Bottom Layer w10: X2.3 2346.57,1911.57 2370,1935 2580,1935 2615,1900 2690,1900 2781.73,1808.27 DA1.37 DA1.37@2781.73,1749.45
TMS: DA1.34 X2.2 | length 479.1
  Bottom Layer w10: X2.2 2395.79,1775.84 2481.63,1690 2600,1690 2611.1,1678.9 DA1.34
TX: DA1.30 DA3.4 | length 236.1
  Bottom Layer w10: DA3.4@2540,1490 2650,1600 DA1.30@2730.55,1600
pads on no net: DA1.2 DA1.3 DA1.4 DA1.5 DA1.6 DA1.13 DA1.18 DA1.33 DA1.40 DA1.43 R10.7 R10.8 R37.1 R37.2 R37.4 U1.3 U4.7 U4.13 U4.14 U4.15 U4.16 U4.17 U4.18 U4.22 U8.3 U9.4 VD2.1 X1.7 X1.8 X2.5 X2.6

## Polygon pours and split planes (outlines as drawn)
GND on Bottom Layer "Bottom Layer-No Net" (solid, remove dead copper, pour order 12): 2260,2590 2260,2470 2120,2470 2120,2580 1870,2580 1800,2275 1790,2040 1790,1875 1875,1685 2040,1425 2265,1235 2330,1200 2390,1170 2630,1090 2760,1070 2830,1060 2890,1060 3015,1090 3310,1185 3610,1415 3830,1750 3905,2070 3845,2470 3710,2740 3560,2920 3410,2920 3410,2640 2860,2640 2810,2590
GND on Top Layer "Top Layer-No Net" (solid, remove dead copper, pour order 3): 3170,1936 3650,1936 3650,1660 3720,1660 3720,1540 3510,1330 3450,1330 3300,1180 3100,1180 2960,1090 2700,1090 2630,1160 2470,1160 2400,1230 2290,1230 1950,1570 1950,1740 2000,1740 2000,1820 2060,1820 2060,1730 2100,1690 2140,1690 2380,1450 2790,1450 2850,1510 3110,1510 3170,1570

## Other copper
Top Layer:
  text "Aig_M 27.05.2011" at 3887,2061 h25 r90

## Silkscreen, mask and mechanical layers (free items; w line width, h text height)
Mechanical 1:
  circle w10: c2840,2145 r1102.36